# EAGLE board ME433_1 (EAGLE 8.7.1)
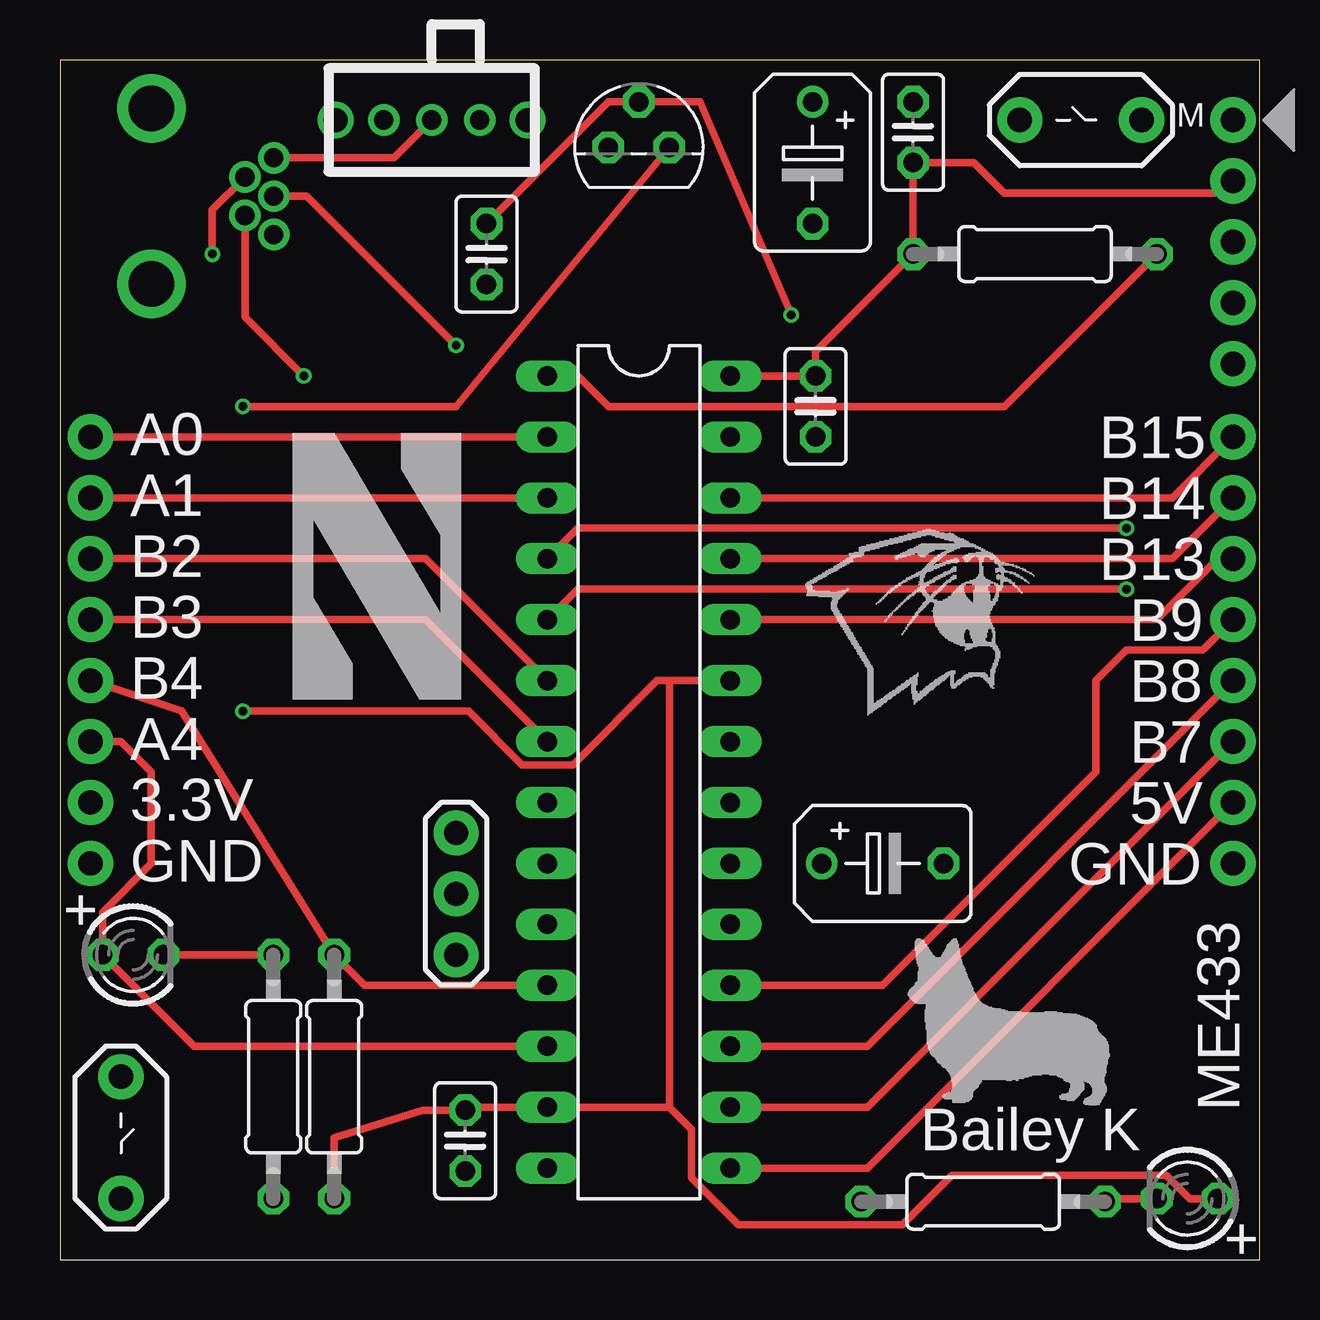
[diagram p0: board, top side]
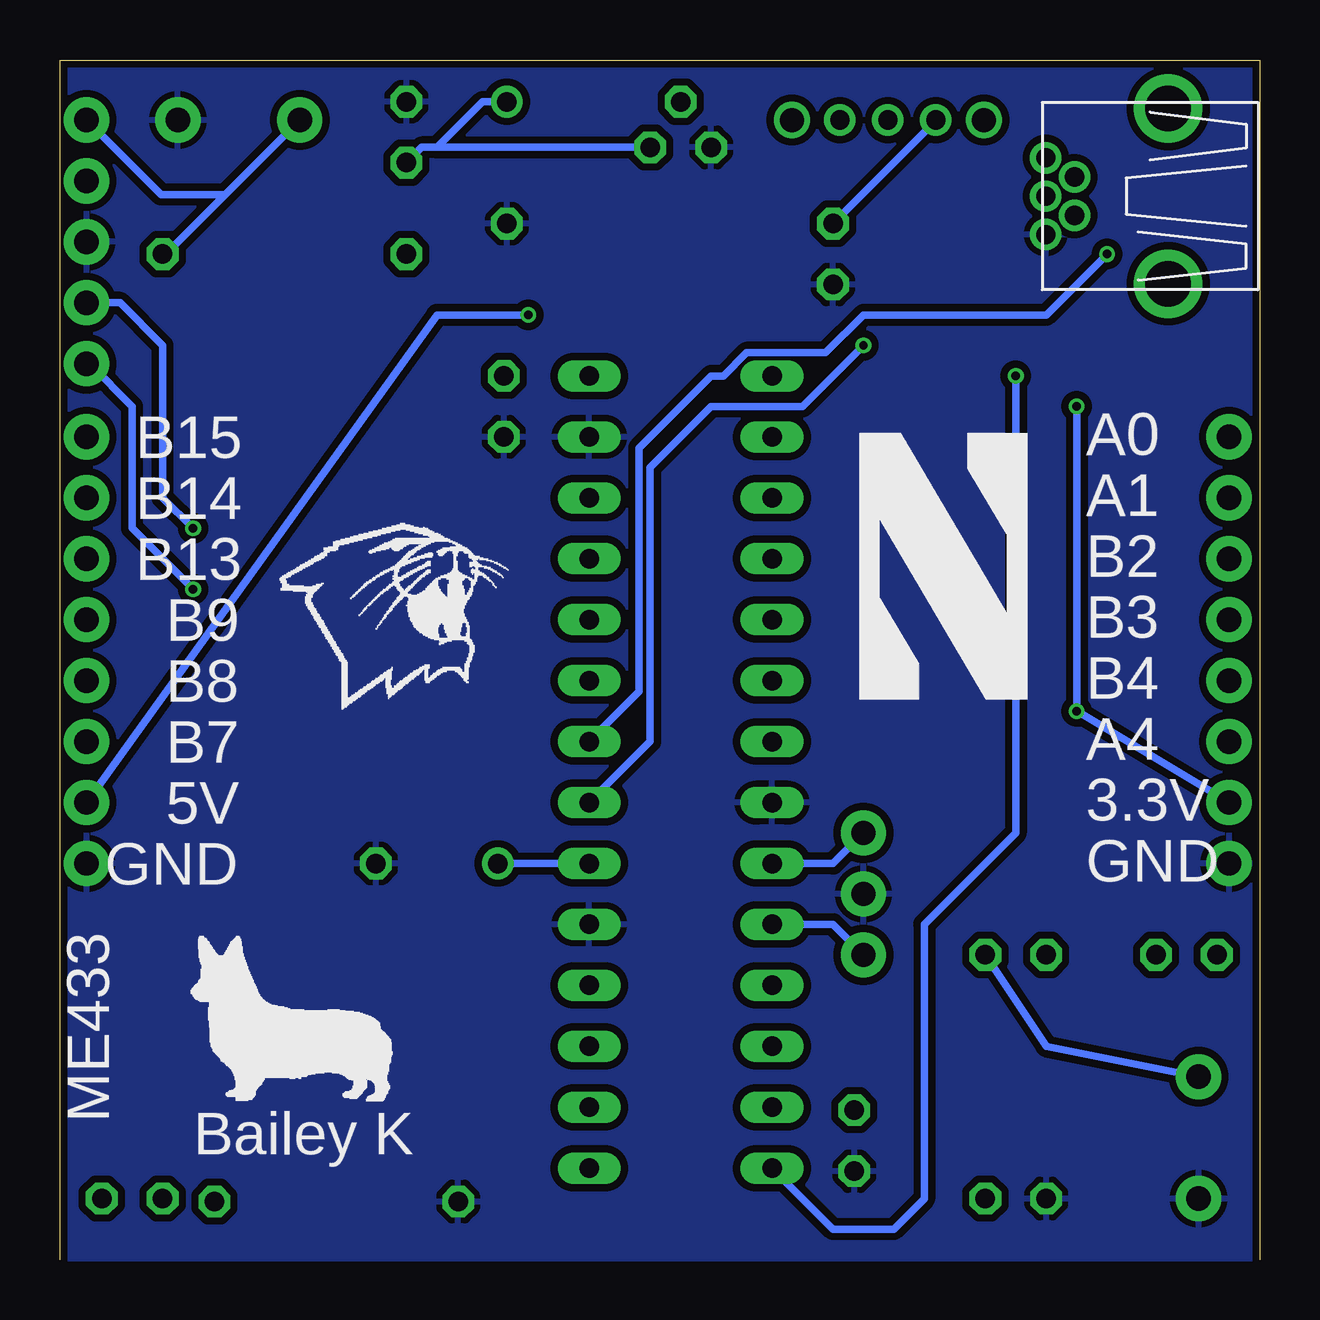
[diagram p1: board, bottom side, seen from below]

Size 50 x 50 mm. Coordinates in mm from the lower left corner, seen from the top.
Outline: 50,0 50,50 0,50 0,0
Copper layers (1*16): Top 0.035mm / dielectric 1.5mm / Bottom 0.035mm
Design rules "SeeedStudio_2layer_DRU_no_angle_20140221": minimum track width 6mil, minimum drill 12mil, track to track 6mil, track to pad 6mil, pad to pad 6mil, via to via 6mil, smd to smd 0mil, copper to edge 10mil, drill to drill 10mil, minimum pad ring 10mil, minimum via ring 6mil, stop-mask expansion 2mil, vias tented up to drill 100mil, thermal gap 10mil

## Footprints (pad centres in the part's own frame; a part is rotated, then mirrored left to right if it is on the bottom)
C025-025X050 = drill 0.813 octagon: 1 -1.27,0; 2 1.27,0
B45181B = drill 0.813: + -2.54,0 | drill 0.813 octagon: - 2.54,0
USB-MB-H = drill 0.8: D+ 5.1,0; D- 3.9,0.8; GND 5.1,-1.6; ID 3.9,-0.8; VBUS 5.1,1.6 | drill 1.9: P$6 0,-3.65; P$7 0,3.65
1X08 = drill 1.016 pad 1.88: 1 0,0; 2 2.54,0; 3 5.08,0; 4 7.62,0; 5 10.16,0; 6 12.7,0; 7 15.24,0; 8 17.78,0
LED3MM = drill 0.813 octagon: A -1.27,0; K 1.27,0
0207/10 = drill 0.813 octagon: 1 -5.08,0; 2 5.08,0
DIL28-3 = drill 0.813 long: 1 -16.51,-3.81; 2 -13.97,-3.81; 3 -11.43,-3.81; 4 -8.89,-3.81; 5 -6.35,-3.81; 6 -3.81,-3.81; 7 -1.27,-3.81; 8 1.27,-3.81; 9 3.81,-3.81; 10 6.35,-3.81; 11 8.89,-3.81; 12 11.43,-3.81; 13 13.97,-3.81; 14 16.51,-3.81; 15 16.51,3.81; 16 13.97,3.81; 17 11.43,3.81; 18 8.89,3.81; 19 6.35,3.81; 20 3.81,3.81; 21 1.27,3.81; 22 -1.27,3.81; 23 -3.81,3.81; 24 -6.35,3.81; 25 -8.89,3.81; 26 -11.43,3.81; 27 -13.97,3.81; 28 -16.51,3.81
SLIDE = drill 0.8: 1 -2,0; 2 0,0; 3 2,0 | drill 1: NC1 -4,0; NC2 4,0
TO92 = drill 0.813 octagon: 1 -1.27,0; 2 0,1.905; 3 1.27,0
PB = drill 1.016 pad 1.88: 1 -2.54,0; 2 2.54,0
1X05 = drill 1.016 pad 1.88: 1 0,0; 2 2.54,0; 3 5.08,0; 4 7.62,0; 5 10.16,0
OSC = drill 1.016 pad 1.88: 1 -2.54,0; 2 0,0; 3 2.54,0

## Placement (x,y rotation side)
C1  0.1uF  [C025-025X050]  31.5,35.56 270 top
C2  0.1uF  [C025-025X050]  16.89,4.95 270 top
C3  0.1uF  [C025-025X050]  17.78,41.91 270 top
C4  0.1uF  [C025-025X050]  35.56,46.99 90 top
C5  10uF  [B45181B]  34.29,16.51 0 top
C6  10uF  [B45181B]  31.37,45.72 270 top
J1  USB-MB-H  [USB-MB-H]  3.81,44.32 0 top
J2  [1X08]  48.9,16.51 90 top
J3  [1X08]  1.27,16.51 90 top
LED1  Red  [LED3MM]  46.99,2.54 180 top
LED2  Green  [LED3MM]  3.05,12.7 0 top
R1  330  [0207/10]  38.48,2.41 0 top
R2  330  [0207/10]  8.89,7.62 90 top
R3  10k  [0207/10]  40.64,41.91 180 top
R4  10k  [0207/10]  11.43,7.62 270 top
U$1  PIC32MX250F128B  [DIL28-3]  24.13,20.32 270 top
U$2  SLIDE  [SLIDE]  15.49,47.5 0 top
U$3  MCP1702  [TO92]  24.13,46.35 0 top
U$4  RESET  [PB]  42.55,47.5 0 top
U$5  USER  [PB]  2.54,5.08 270 top
U$6  PICKIT3  [1X05]  48.9,47.5 270 top
U$7  8MHz  [OSC]  16.51,15.24 270 top

## Library data of the parts
C1-C6 J1 LED1 LED2 R1-R4 U$1-U$7 = ME433
J2 J3 = ME433; PROD_ID: CONN-08438

## Nets
+3V3: C1.1 C2.1 C4.1 C6.+ J3.2 LED1.A R3.2 R4.2 U$1.13 U$1.23 U$1.28 U$3.3 U$6.2
+5V: C3.1 J2.2 U$1.15 U$2.1 U$3.2
A0: J3.8 U$1.2
A1: J3.7 U$1.3
A4/LED: J3.3 LED2.A U$1.12
B2: J3.6 U$1.6
B3: J3.5 U$1.7
B4/USER: J3.4 R4.1 U$1.11 U$5.1
B7: J2.3 U$1.16
B8: J2.4 U$1.17
B9: J2.5 U$1.18
B13: J2.6 U$1.24
B14: J2.7 U$1.25
B15: J2.8 U$1.26
D+: J1.D+ U$1.21
D-: J1.D- U$1.22
GND: C1.2 C2.2 C3.2 C4.2 C5.- C6.- J1.GND J2.1 J3.1 R1.1 R2.1 U$1.8 U$1.19 U$1.27 U$3.1 U$4.2 U$5.2 U$6.3 U$7.2
MCLR: R3.1 U$1.1 U$4.1 U$6.1
N$1: J1.VBUS U$2.2
N$2: LED1.K R1.2
N$3: LED2.K R2.2
N$4: U$1.9 U$7.1
N$5: U$1.10 U$7.3
N$7: C5.+ U$1.20
PGC: U$1.5 U$6.5
PGD: U$1.4 U$6.4
USBID: J1.ID U$1.14

## Tracks (layer width: path | path; a pad name or v marks a point on that pad's centre or on a via)
+3V3  (via drill 0.35)
  Top 0.305: R4.2 11.43,5.08 15.11,6.22 C2.1 17.02,6.35 U$1.13 25.4,6.35 | U$3.3 16.51,35.56 v7.62,35.56 | v7.62,22.86 17.02,22.86 19.26,20.62 21.38,20.62 24.89,24.13 25.4,24.13 | U$1.23 25.4,24.13 | 25.4,24.13 25.4,6.35 | LED1.A 47.09,2.54 46.12,3.5 37.17,3.5 35.11,1.45 28.28,1.45 26.31,3.41 26.31,5.44 25.4,6.35 | U$1.28 C1.1 31.5,37.85 R3.2 C4.1 38.1,45.72 39.37,44.45 48.39,44.45 U$6.2
  Bottom 0.305: 34.29,46.35 U$3.3 | v7.62,35.56 v7.62,22.86 J3.2 | 34.29,46.35 32.38,48.26 C6.+ | 34.29,46.35 34.92,46.35 C4.1
+5V  (via drill 0.35)
  Top 0.305: C3.1 22.86,48.26 U$3.2 26.67,48.26 v30.48,39.37 | U$1.15 33.66,3.81 J2.2
  Bottom 0.305: U$2.1 13.49,47.47 C3.1 | v30.48,39.37 34.29,39.37 J2.2
A0
  Top 0.305: J3.8 U$1.2
A1
  Top 0.305: J3.7 U$1.3
A4/LED
  Top 0.305: U$1.12 5.59,8.89 LED2.A 1.78,14.48 3.81,16.51 3.81,20.32 2.54,21.59 J3.3
B2
  Top 0.305: J3.6 15.24,29.21 U$1.6
B3
  Top 0.305: J3.5 15.24,26.67 U$1.7
B4/USER
  Top 0.305: U$1.11 12.7,11.43 R4.1 5.08,22.86 J3.4
  Bottom 0.305: R4.1 8.89,8.89 U$5.1
B7
  Top 0.305: U$1.16 33.66,6.35 42.23,14.92 J2.3
B8
  Top 0.305: U$1.17 33.66,8.89 J2.4
B9
  Top 0.305: U$1.18 34.29,11.43 43.18,20.32 43.18,24.13 44.45,25.4 47.62,25.4 J2.5
B13
  Top 0.305: U$1.24 45.72,26.67 48.26,29.21 J2.6
B14
  Top 0.305: J2.7 46.35,29.21 U$1.25
B15
  Top 0.305: U$1.26 46.35,31.75 J2.8
D+  (via drill 0.35)
  Top 0.305: J1.D+ 10.29,44.32 v16.51,38.1
  Bottom 0.305: v16.51,38.1 19.05,35.56 22.86,35.56 25.4,33.02 25.4,21.59 U$1.21
D-  (via drill 0.35)
  Top 0.305: J1.D- 6.35,43.76 v6.35,41.91
  Bottom 0.305: v6.35,41.91 8.89,39.37 16.51,39.37 18.09,37.8 21.38,37.8 22.34,36.83 22.86,36.83 25.86,33.83 25.86,23.67 U$1.22
GND
  pour Bottom (isolate 0.305): 0,0 50.04,0 50.04,50.04 0,50.04
MCLR
  Top 0.305: R3.1 39.37,35.56 22.86,35.56 21.59,36.83 U$1.1
  Bottom 0.305: U$4.1 43.12,44.39 | 43.12,44.39 45.59,41.91 R3.1 | 43.12,44.39 45.78,44.39 U$6.1
N$1
  Top 0.305: J1.VBUS 13.92,45.92 U$2.2
N$2
  Top 0.305: LED1.K 43.69,2.54 R1.2
N$3
  Top 0.305: R2.2 LED2.K
N$4
  Bottom 0.305: U$7.1 17.78,16.51 U$1.9
N$5
  Bottom 0.305: U$7.3 17.78,13.97 U$1.10
N$7
  Bottom 0.305: C5.+ U$1.20
PGC  (via drill 0.35)
  Top 0.305: U$1.5 21.59,27.94 v44.45,27.94
  Bottom 0.305: v44.45,27.94 46.99,30.48 46.99,35.56 48.77,37.34 U$6.5
PGD  (via drill 0.35)
  Top 0.305: U$1.4 21.59,30.48 v44.45,30.48
  Bottom 0.305: v44.45,30.48 45.72,31.75 45.72,38.1 47.5,39.88 U$6.4
USBID  (via drill 0.35)
  Top 0.305: J1.ID 7.71,39.28 v10.16,36.83
  Bottom 0.305: v10.16,36.83 10.16,17.78 13.97,13.97 13.97,2.54 15.24,1.27 17.78,1.27 U$1.14

## Text on the board
tPlace: M | A0 | B15 | A1 | B14 | B2 | B13 | B3 | B9 | B4 | B8 | A4 | B7 | 3.3V | 5V | GND | GND | + | ME433 | Bailey K | +
bPlace: A0 | B15 | A1 | B14 | B2 | B13 | B3 | B9 | B4 | B8 | A4 | B7 | 3.3V | 5V | GND | GND | ME433 | Bailey K